# Altium PCB PiZero2W_Hat.PcbDoc
Units mil, origin at the board's own origin, x right, y up, seen from the top; angles counter-clockwise.
Board outline 2559.06 x 1181.1 mil, 4 copper layers (Top Layer, Layer 2, Layer 3, Bottom Layer), stack 23.756 mil thick; 31 components, 22 nets, 146 pads, 28 vias.
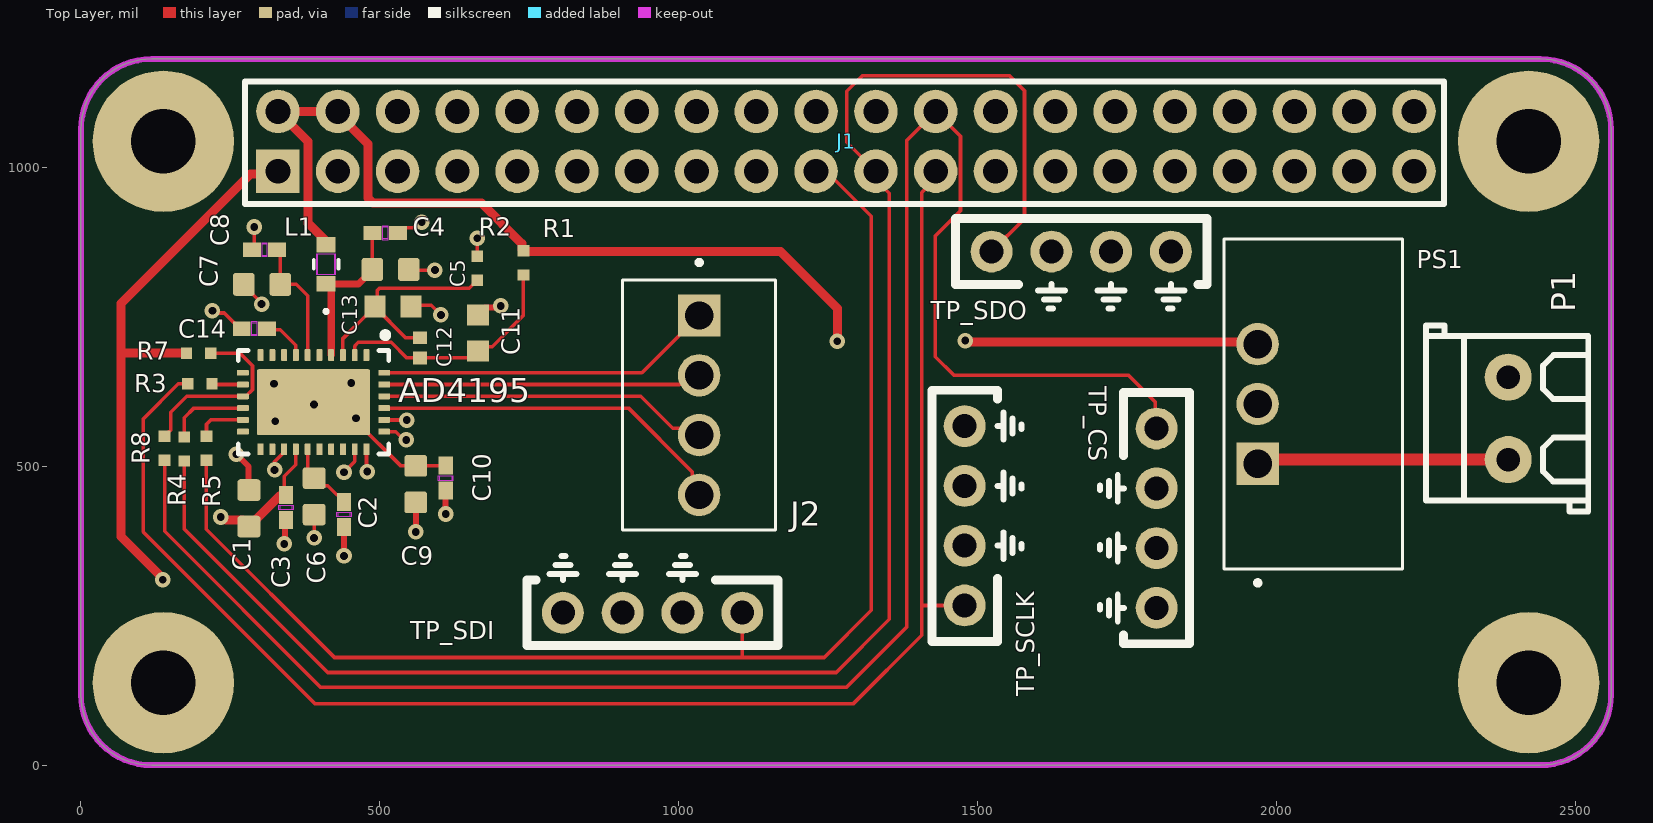
[diagram p0: Top Layer view]
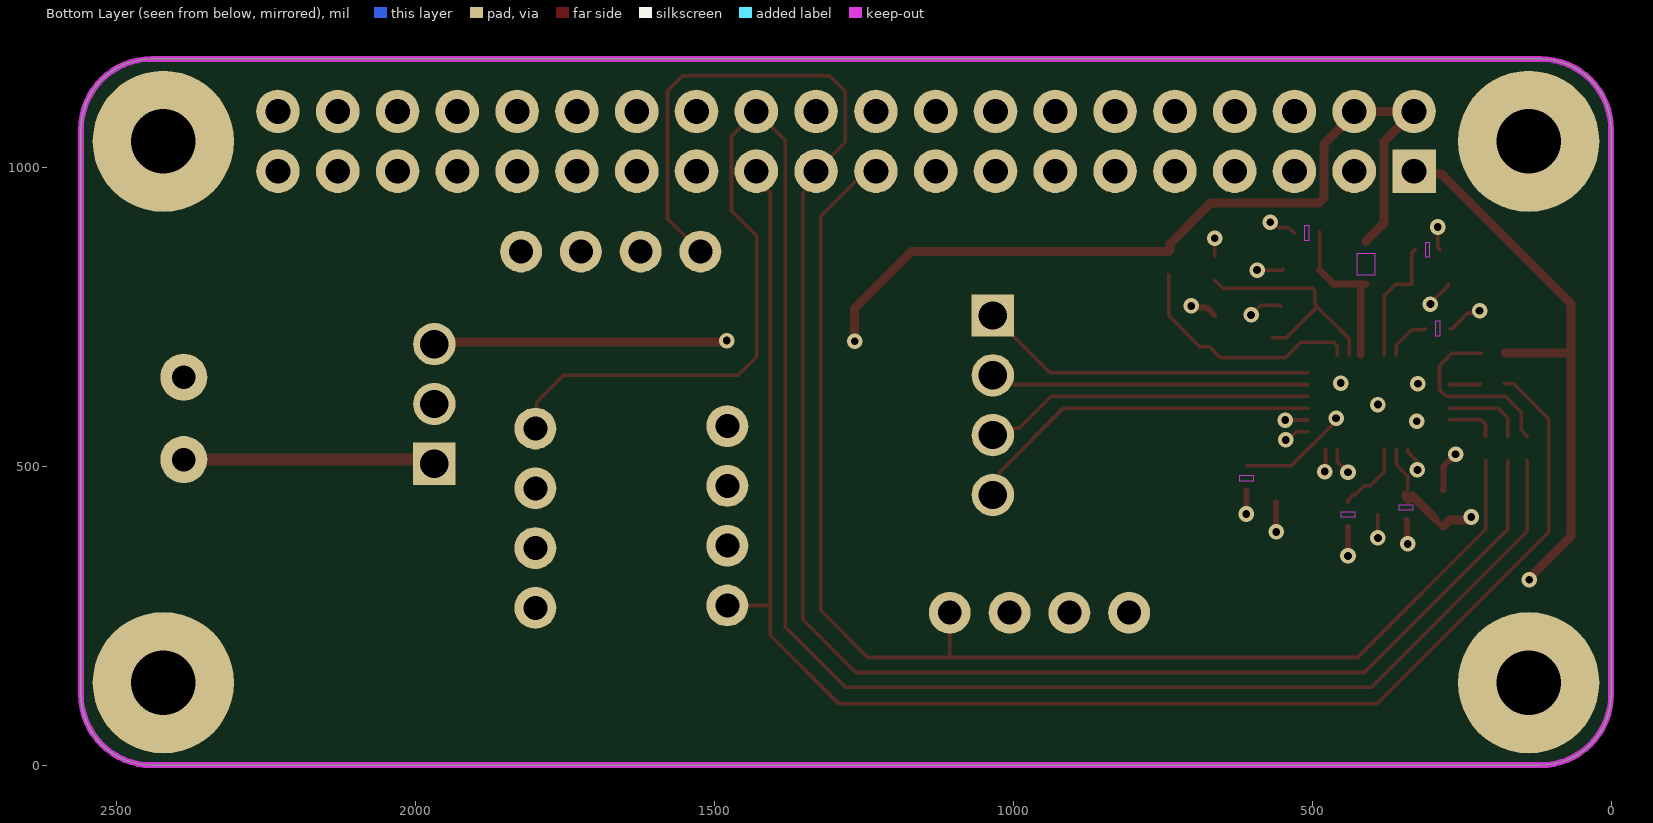
[diagram p1: Bottom Layer view, seen from below]
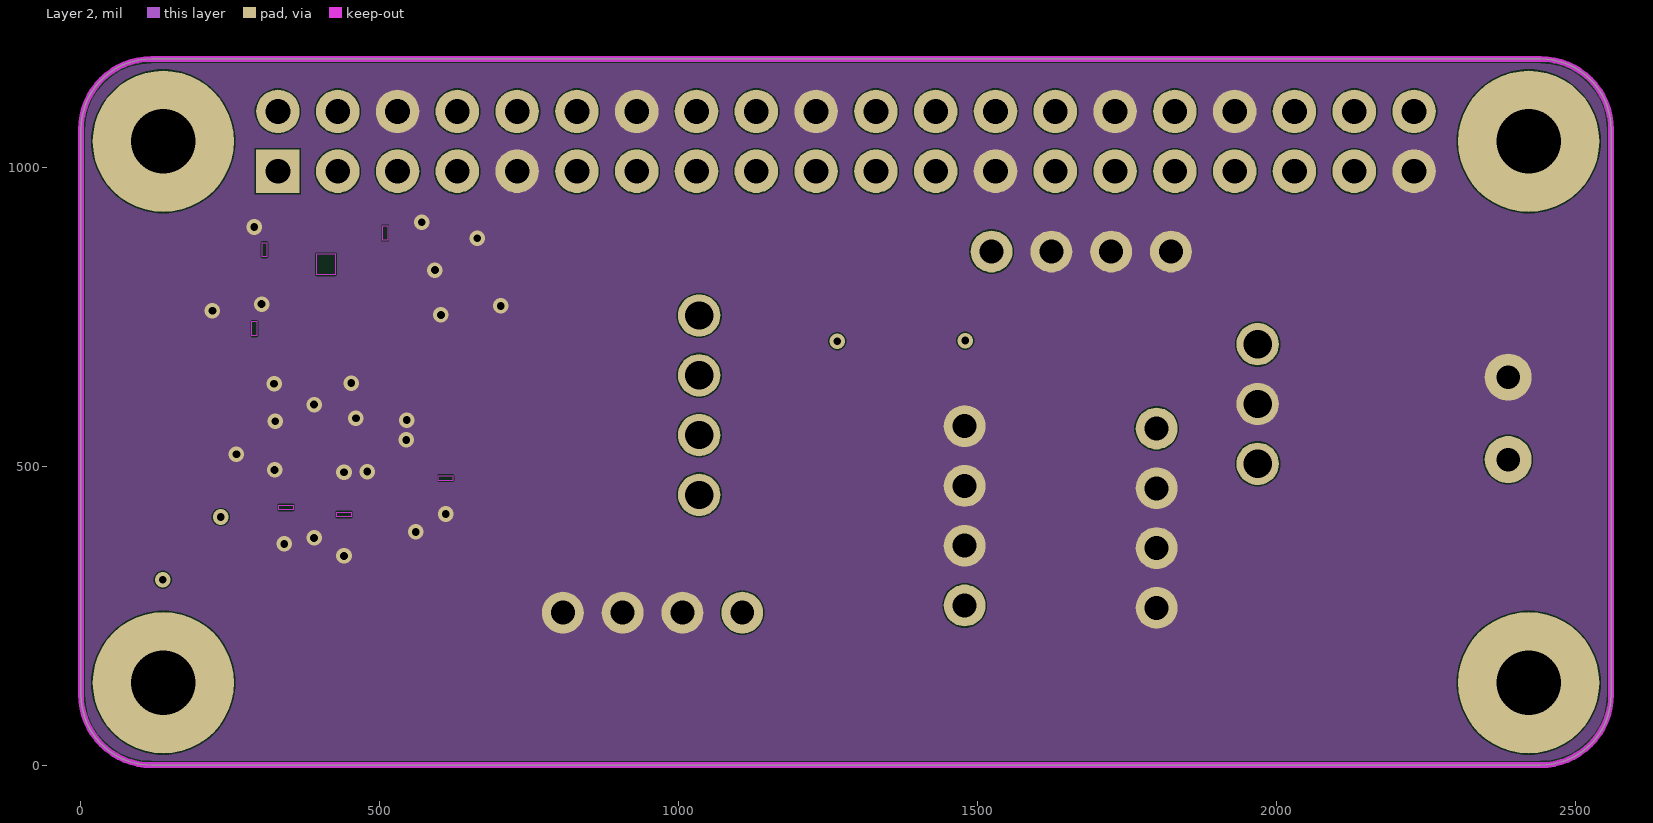
[diagram p2: Layer 2]
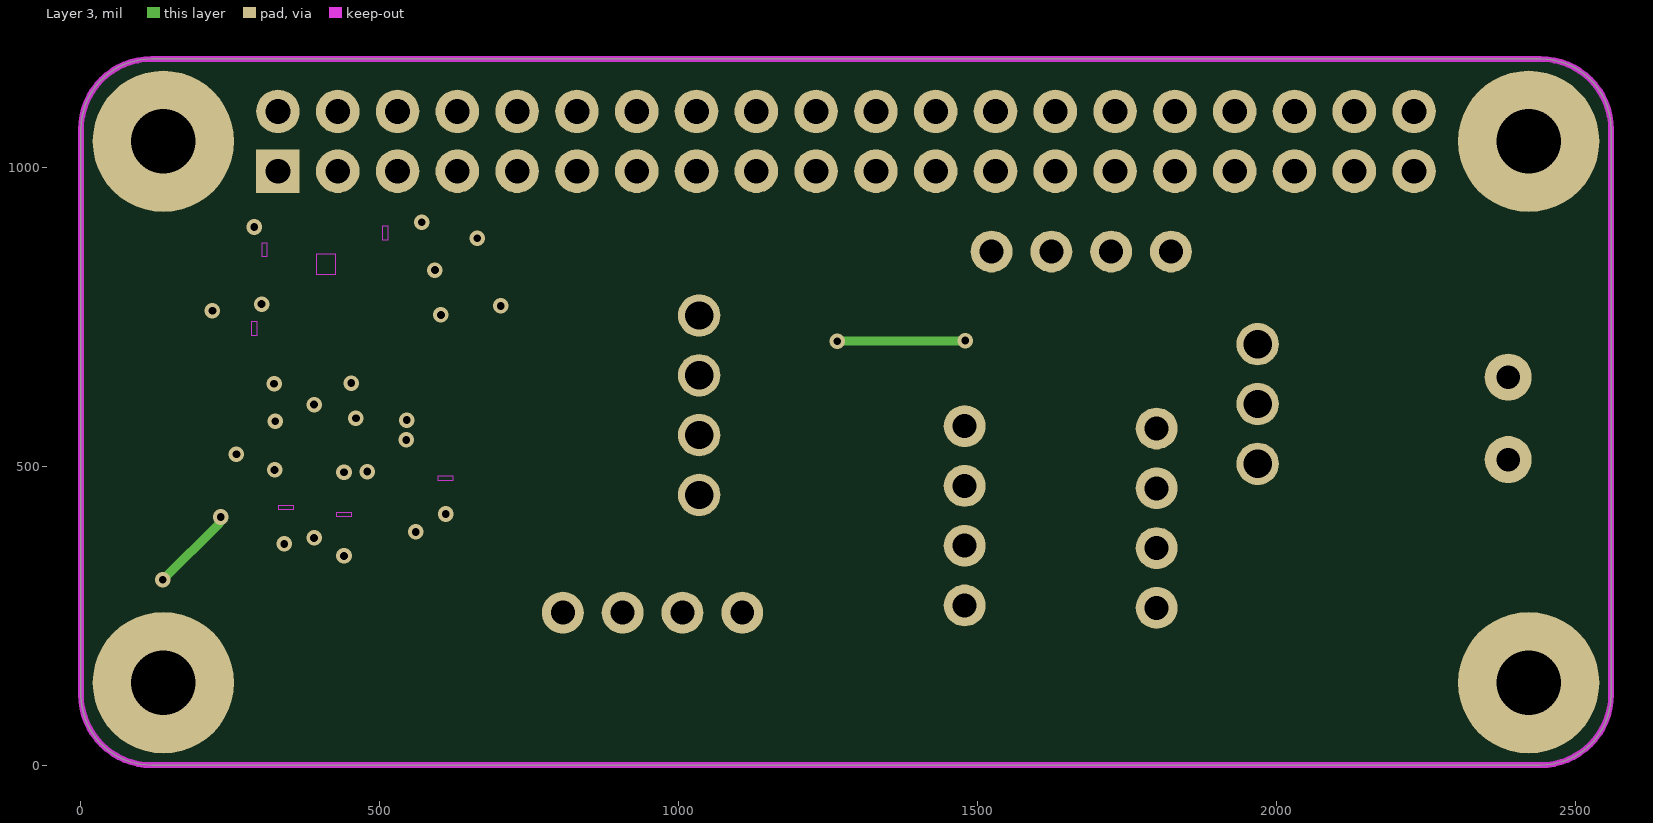
[diagram p3: Layer 3]
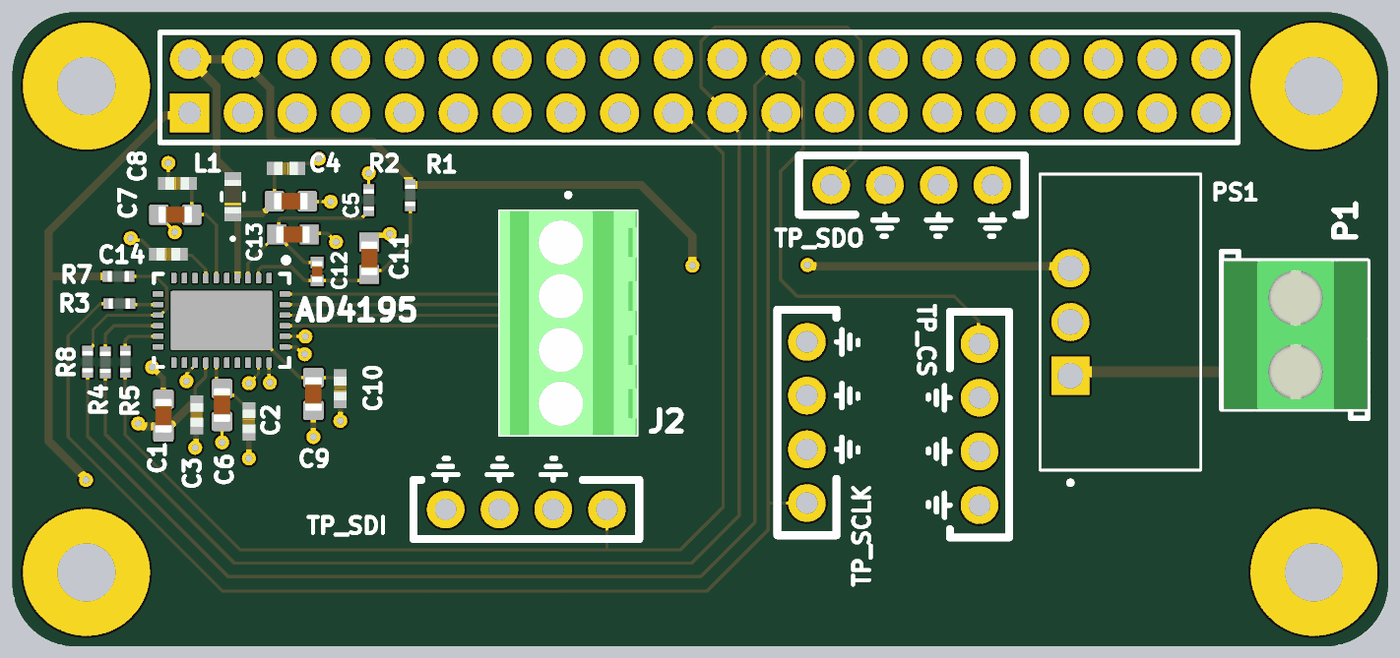
[diagram p4: 3D render of the assembled board from above, using the file's embedded part models]

## Layer stack, top to bottom
Top Solder: solder mask 0.4, Solder Resist, Dk 3.5
Top Layer: signal copper 1.4
Dielectric 2: prepreg 2.8, PP-006, Dk 4.1
Layer 2: signal copper 1.378
Dielectric 1: dielectric 12.6, FR-4, Dk 4.8
Layer 3: signal copper 1.378
Dielectric 3: prepreg 2.8, PP-006, Dk 4.1
Bottom Layer: signal copper 1.4
Bottom Solder: solder mask 0.4, Solder Resist, Dk 3.5

## Board outline
0,118.11 0,1062.99 cw(c118.11,1062.99) 118.11,1181.1 2440.94,1181.1 cw(c2440.94,1062.99) 2559.06,1062.99 2559.06,118.11 cw(c2440.94,118.11) 2440.94,0 118.11,0 cw(c118.11,118.11)

## Design rules (kind name [scope] priority, off if disabled: settings)
Clearance [All] p1: gap=2 ignorepadtopadclearanceinfootprint=FALSE
MinimumSolderMaskSliver [All] p1: minsoldermaskwidth=4
PlaneConnect [All] p1: planeconnectstyle=Direct reliefexpansion=20 reliefentries=4 reliefconductorwidth=10 reliefairgap=10
PolygonConnect [All] p1: connectstyle=Direct reliefconductorwidth=10 reliefentries=4 polygonreliefangle="90 Angle" airgapwidth=10
RoutingVias [All] p1: holewidth=28 width=50 viastyle="Through Hole" minholewidth=28 minwidth=50 maxholewidth=28 maxwidth=50
SilkToSilkClearance [All] p1: silktosilkclearance=3
SilkToSolderMaskClearance [IsPad] p1: minsilkscreentomaskgap=5 clearancetoexposedcopper=TRUE
SolderMaskExpansion [All] p1: expansion=4 istentingtop=FALSE
SupplyNets "Schematic Supply Nets_7" [InNet('+24')] p1: voltage=0.000
SupplyNets "Schematic Supply Nets_3" [InNet('GND')] p2: voltage=0.000
SupplyNets "Schematic Supply Nets_2" [InNet('+3.3')] p3: voltage=0.000
SupplyNets "Schematic Supply Nets" [InNet('+5')] p4: voltage=0.000
Width [All] p1: maxlimit=100 minlimit=6 preferedwidth=10
26 further rules are at their usual default settings.

## Components (designator, comment, footprint, x,y, rotation, side; value= is the part's Value field where it differs from the comment)
AD4195 "omponent_1" QFN50P400X600X80_HS-33N 389,607 r270 top
C1 "1uF" CAPC1608X90N#1 390,449.49 r270 top
C2 "0.1uF" 0402_AVX 440,419 r270 top
C3 "1uF" CAPC1608X90N#1 281,429.51 r270 top
C4 "0.1uF" 0402_AVX 509,890 r180 top
C5 "1uF" CAPC1608X90N#1 518,829 r180 top
C6 "0.1uF" 0402_AVX 343,431 r90 top
C7 "1uF" CAPC1608X90N#1 303,804 r0 top
C8 "0.1uF" 0402_AVX 307,862 r0 top
C9 "1uF" CAPC1608X90N#1 560,470 r90 top
C10 "0.1uF" 0402_AVX 610,480 r90 top
C11 "4.7 nF" CAPC1608X90N#2 664,722.68 r270 top
C12 "47 nF" CAPC1005X55N 567,697.99 r270 top
C13 "4.7 nF" CAPC1608X90N#2 522,767 r180 top
C14 "0.1uF" 0402_AVX 290,730 r0 top
J1 "Header_RaspberryPi_0_2W" "Edge Connector" 329.53,993.31 r0 top
J2 "4P Screw Terminal Block" TE_282834-4 1034,602 r270 top
L1 "1kΩ at 100MHz" IND_1608_TDK 410,837.41 r90 top
P1 "2P Screw Terminal Block" "P_Terminal block 3.5mm-pitch" 2387,580 r90 top
PS1 "Buck Converter" CONV_TSR_2-2450N 2061,604 r90 top
R1 "0 Ω" RES_ERJ-2GE0R00X 740,840 r90 top
R2 "0 Ω" RES_ERJ-2GE0R00X 663,831 r90 top
R3 "0 Ω" RES_ERJ-2GE0R00X 198.84,638 r0 top
R4 "0 Ω" RES_ERJ-2GE0R00X 173,528.84 r90 top
R5 "0 Ω" RES_ERJ-2GE0R00X 210,530 r90 top
R7 "1MΩ" RES_ERJ2RKF1004X 197,689 r180 top
R8 "0 Ω" RES_ERJ-2GE0R00X 140,530 r90 top
TP_CS "10x Probe TP" TP10x_Probe 1799,413 r270 top (schematic designator TP4)
TP_SCLK "10x Probe TP" TP10x_Probe 1478,417 r90 top (schematic designator TP3)
TP_SDI "10x Probe TP" TP10x_Probe 956,255 r180 top (schematic designator TP1)
TP_SDO "10x Probe TP" TP10x_Probe 1673,859 r0 top (schematic designator TP2)

## Footprints (in the part's own frame and the unit in brackets; to place one, negate y for a bottom-side part, rotate by r counter-clockwise, add the part's x,y. Pads: shape width x height; smd on the part's side, far side on the other; paste and mask are expansions set on the pad)
0402_AVX [mil]
  rect 30x24 smd paste+0 mask+0: 1(-21,0) 2(21,0)
  Top Layer keep-out region: -4,-10 -4,10 4,10 4,-10
  Keep-Out Layer region: -4,-12 -4,12 4,12 4,-12
  body extent -22,-12 22,12, height 22
CAPC1005X55N [mm]
  rect 0.54x0.6 smd: 1(-0.432,0) 2(0.432,0)
  body extent -0.5,-0.25 0.5,0.25, height 0.55
CAPC1608X90N#1 [mm]
  rrect25% 0.92x0.97 smd: 1(-0.775,0) 2(0.775,0)
  body extent -0.8,-0.4 0.8,0.4, height 0.9
CAPC1608X90N#2 [mm]
  rect 0.89x0.93 smd: 1(-0.77,0) 2(0.77,0)
  body extent -0.8,-0.4 0.8,0.4, height 0.9
CONV_TSR_2-2450N [mm]
  rect 1.8x1.8 / inner round 1.8 / far side rect 1.8x1.8 hole 1.2: 1(-2.54,2.36)
  round 1.8 hole 1.2: 2(0,2.36) 3(2.54,2.36)
  silkscreen extent -7.7,-3.8 7,3.8
"Edge Connector" [mm]
  rect 1.85x1.85 hole 1.05: 1(0,0)
  round 1.85 hole 1.05: 2(0,2.54) 3(2.54,0) 4(2.54,2.54) 5(5.08,0) 6(5.08,2.54) 7(7.62,0) 8(7.62,2.54) 9(10.16,0) 10(10.16,2.54) 11(12.7,0) 12(12.7,2.54) 13(15.24,0) 14(15.24,2.54) 15(17.78,0) 16(17.78,2.54) 17(20.32,0) 18(20.32,2.54) 19(22.86,0) 20(22.86,2.54) 21(25.4,0) 22(25.4,2.54) 23(27.94,0) 24(27.94,2.54) 25(30.48,0) 26(30.48,2.54) 27(33.02,0) 28(33.02,2.54) 29(35.56,0) 30(35.56,2.54) 31(38.1,0) 32(38.1,2.54) 33(40.64,0) 34(40.64,2.54) 35(43.18,0) 36(43.18,2.54) 37(45.72,0) 38(45.72,2.54) 39(48.26,0) 40(48.26,2.54)
  silkscreen extent -1.4,-1.4 49.53,3.81
IND_1608_TDK [mm]
  rect 0.656x0.8 smd paste+0 mask+0: 1(-0.828,0) 2(0.828,0)
  Top Layer keep-out region: -0.449,-0.349 -0.449,0.349 0.449,0.349 0.449,-0.349
  Keep-Out Layer region: -0.449,-0.4 -0.449,0.4 0.449,0.4 0.449,-0.4
  silkscreen extent -2.07,-0.53 0.19,0.53, body extent -0.8,-0.4 0.8,0.4, height 0.8
"P_Terminal block 3.5mm-pitch" [mm]
  round 2 hole 1: 1(-1.75,0) 2(1.75,0)
  silkscreen extent -3.95,-3.4 3.95,3.5, body extent -3.5,-3.4 3.5,3.4, height 8.4
QFN50P400X600X80_HS-33N [mm] "QFN, 32-Leads, Body 4.00x6.00mm, Pitch 0.50mm, Thermal Pad 2.60x4.60mm, IPC Medium Density"
  rrect25% 0.5x0.25 smd mask+0.07: 1(-2,2.25) 2(-2,1.75) 3(-2,1.25) 4(-2,0.75) 5(-2,0.25) 6(-2,-0.25) 7(-2,-0.75) 8(-2,-1.25) 9(-2,-1.75) 10(-2,-2.25) 17(2,-2.25) 18(2,-1.75) 19(2,-1.25) 20(2,-0.75) 21(2,-0.25) 22(2,0.25) 23(2,0.75) 24(2,1.25) 25(2,1.75) 26(2,2.25)
  rrect25% 0.25x0.5 smd mask+0.07: 11(-1.25,-3) 12(-0.75,-3) 13(-0.25,-3) 14(0.25,-3) 15(0.75,-3) 16(1.25,-3) 27(1.25,3) 28(0.75,3) 29(0.25,3) 30(-0.25,3) 31(-0.75,3) 32(-1.25,3)
  rrect5% 2.8x4.8 smd mask+0.07: 33(0,0)
  silkscreen extent -2.97,-3.2 2.2,3.2, body extent -2.05,-3.05 2.05,3.05, height 0.8
RES_ERJ2RKF1004X [mm]
  rect 0.475x0.5 smd: 1(-0.512,0) 2(0.512,0)
  body extent -0.5,-0.25 0.5,0.25, height 0.35
RES_ERJ-2GE0R00X [mm]
  rect 0.475x0.5 smd paste+0 mask+0.102: 1(-0.512,0) 2(0.512,0)
  body extent -0.5,-0.25 0.5,0.25, height 0.35
TE_282834-4 [mm]
  rect 1.8x1.8 / inner round 1.8 / far side rect 1.8x1.8 hole 1.2: 1(-3.81,0)
  round 1.8 hole 1.2: 2(-1.27,0) 3(1.27,0) 4(3.81,0)
  silkscreen extent -6.16,-3.25 5.31,3.25, body extent -5.31,-3.25 5.31,3.25, height 10
TP10x_Probe [mil] "Small Probs footprint"
  round 70 hole 40: 1(-150,0) 2(-50,0) 2(50,0) 2(150,0)
  silkscreen extent -210,-95 210,55

## Part data
AD4195: library part Component_1
C1 C3 C5 C7 C9: library part C0603C105K4RACTU, Package=None, Availability=Unavailable, MP=C0603C105K4RACTU, Price=None
C2 C4 C6 C8 C10 C14: library part 04023C104KAT2A, "Description", Manufacturer_Name="KYOCERA AVX", Copyright="Copyright (C) 2025 Ultra Librarian. All rights reserved.", Manufacturer_Part_Number=04023C104KAT2A
C11 C13: library part GRM1885C1H472JA01D, "0603 4.7 nF 50 V Â±5% Tolerance C0G SMT Multilayer Ceramic Capacitor", Package="1608 Murata", Check_prices=https://www.snapeda.com/parts/GRM1885C1H472JA01D/Murata/view-part/?ref=eda, MF=Murata, MP=GRM1885C1H472JA01D, SnapEDA_Link=https://www.snapeda.com/parts/GRM1885C1H472JA01D/Murata/view-part/?ref=snap
C12: library part GRM155R71E473KA88D, "SMD capacitor X7R(EIA) with capacitance 47000pF Tol.10%. Rated voltage 25Vdc 125C", Package="1005-2 Murata", Check_prices=https://www.snapeda.com/parts/GRM155R71E473KA88D/Murata/view-part/?ref=eda, MF=Murata, MP=GRM155R71E473KA88D, SnapEDA_Link=https://www.snapeda.com/parts/GRM155R71E473KA88D/Murata/view-part/?ref=snap
J2: library part 282834-4, "Conn; Term Blk; PCB; Wire Receptacle; 4; 2.54mm; 30-16AWG; Green; 10A;150V; M1.6", Package=None, Centerline_Pitch="2.54 mm[.1 in]", Check_prices=https://www.snapeda.com/parts/282834-4/TE+Connectivity+AMP+Connectors/view-part/?ref=eda, EU_RoHS_Compliance="Compliant with Exemptions", MF="TE Connectivity", MP=282834-4, Number_of_Positions=4, SnapEDA_Link=https://www.snapeda.com/parts/282834-4/TE+Connectivity+AMP+Connectors/view-part/?ref=snap
L1: library part MPZ1608S102ATA00, "Description", Manufacturer_Name=TDK, Copyright="Copyright (C) 2025 Ultra Librarian. All rights reserved.", Manufacturer_Part_Number=MPZ1608S102ATA00
P1: library part "P_Terminal block", "Green Straight pin 3.5mm  pitch; P=3.5mm  Screw terminal ROHS", LCSC Part#=C474892, Manufacturer="Cixi Kefa Elec", MFR Part #=KF350-3.5-2P, Datasheet=https://datasheet.lcsc.com/lcsc/2001160007_Cixi-Kefa-Elec-KF350-3-5-2P_C474892.pdf
PS1: library part TSR_2-2450N, Package=None, Availability=Unavailable, MF="{'manufacturer': u'Traco Power'}", MP=TSR_2-2450N, Price=None
R1 R2 R3 R4 R5 R8: library part ERJ-2GE0R00X, "Series/Type: Thick Film Chip Resistors, Power Rating (W): -, Chip Size (LxW(EIA)) (mm): 1.0 x 0.5 (EIA:0402), Resistance Values (â„", Package="1020-2 Panasonic", Check_prices=https://www.snapeda.com/parts/ERJ-2GE0R00X/Panasonic+Electronic+Components/view-part/?ref=eda, MF=Panasonic, MP=ERJ-2GE0R00X, SnapEDA_Link=https://www.snapeda.com/parts/ERJ-2GE0R00X/Panasonic+Electronic+Components/view-part/?ref=snap
R7: library part ERJ2RKF1004X, "1 MOhms 1% 0.1W, 1/10W Chip Resistor 0402 (1005 Metric) Automotive AEC-Q200 Thick Film", Package="1005-2 Panasonic", Check_prices=https://www.snapeda.com/parts/ERJ-2RKF1004X/Panasonic+Electronic+Components/view-part/?ref=eda, MF="Panasonic Electronic", MP=ERJ-2RKF1004X, SnapEDA_Link=https://www.snapeda.com/parts/ERJ-2RKF1004X/Panasonic+Electronic+Components/view-part/?ref=snap
TP_CS TP_SCLK TP_SDI TP_SDO: library part TP_10x_Probe, "Test Point 300 mil centers"

## Free pads (board coordinates)
  round 236.22 hole 108.27: 3(137.8,1043.31) 4(137.8,137.8) 5(2421.26,137.8) 6(2421.26,1043.31)

## Via types
v1: diameter 26, hole 13, Top Layer to Bottom Layer, 28 vias

## Nets (pads, with @x,y where several pads share a name; then routed paths per layer and width w, separated by ;. In a path a pad name is that pad's centre, name@x,y a point inside that pad or via, vN(x,y) a via of type N, cw(c..) or ccw(c..) an arc to the next point about the centre after c; other vN are vias at no path point)
+3.3: AD4195.20 C3.2 C6.2 J1.1 R7.2 | length 1320
  Top Layer w6: C6.2@340,462 340,483 359.47,502.47 AD4195.20
  Top Layer w10: C3.2 281.98,399 295.09,412.11 C3.2@295.09,413.09 ; J1.1@325.19,988.97 J1.1
  Top Layer w15: v1(137,310) 137,312.76 67,382.76 67,689 ; R7.2 67,689 ; v1(234,415) 236.98,415 242.37,409.61 270.39,409.61 C3.2@280,400 ; C3.2@295.09,413.09 332.5,450.5 C6.2@343,450.5 ; J1.1@325.19,988.97 283.97,988.97 67,772 67,689 ; C6.2@338.5,444.5 343,449 C6.2@343,450.5 ; C6.2 C6.2@343,450.5
  Layer 3 w15: v1(137,310) 231.9,404.9 231.9,412.9 v1(234,415)
+5: J1.2 J1.4 L1.2 PS1.3 R1.2 | length 2144.3
  Top Layer w15: L1.2@410,876 380,906 380,1042.83 J1.2 J1.4 429.53,1089.2 479.89,1038.83 479.89,948.79 488.68,940 670,940 737.66,872.34 737.66,862.01 739.51,860.16 R1.2 ; R1.2@740,859.16 1169.84,859.16 1265,764 v1(1265,709) ; v1(1479,710) 1481.1,707.9 1964.19,707.9 PS1.3
  Layer 3 w15: v1(1265,709) 1265.5,709.5 1478.5,709.5 v1(1479,710)
+24: P1.1 PS1.1 | length 421.9
  Top Layer w20: PS1.1 1975.19,511.1 P1.1
AIN1: AD4195.32 J2.1 | length 566.6
  Top Layer w6: AD4195.32 938.21,656.21 J2.1
AIN2: AD4195.31 J2.2 | length 533.3
  Top Layer w6: AD4195.31 1000.97,636.53 1016.45,652 J2.2
AIN3: AD4195.30 J2.3 | length 553.7
  Top Layer w6: AD4195.30 936.16,616.84 989.57,563.43 1022.57,563.43 J2.3
AIN4: AD4195.29 J2.4 | length 602.8
  Top Layer w6: AD4195.29 915.84,597.16 1022.08,490.92 1022.08,463.92 J2.4
CS: J1.24 R8.1 TP_CS.1 | length 3281.3
  Top Layer w6: R8.1 140,391 401,130 1280,130 1381,231 1381,1044.78 J1.24 1470.94,1051.89 1470.94,926.94 1429,885 1429,683 1460,652 1752,652 1797,607 1797,565 TP_CS.1
GND: AD4195.19 AD4195.25 AD4195.26 AD4195.27 AD4195.28 AD4195.33 C1.2 C2.2 C3.1 C4.1 C5.1 C6.1 C7.1 C8.1 C9.1 C9.2 C10.1 C10.2 C11.1 C13.1 C14.1 J1.6 J1.9 J1.14 J1.20 J1.25 J1.30 J1.34 J1.39 P1.2 PS1.2 R2.2 TP_CS.2 TP_SCLK.2 TP_SDI.2 TP_SDO.2 | length 1044.4
  Top Layer w6: v1(220,760) 223.83,756.17 239.83,756.17 266,730 C14.1 ; C7.1 272.49,802.19 302.22,772.46 v1(302.22,771.11) ; C8.1 290,866 v1(290,900) ; v1(323.83,493.83) 323.83,507.38 339.79,523.34 AD4195.19 ; v1(390,380) C1.2 ; v1(440,490) 457.9,507.9 AD4195.25 ; v1(460,580) 460,575.37 534.37,501 C9.2@560,501 ; AD4195.26 477.58,492.42 v1(479,491) ; AD4195.27 526.67,557.79 540.46,544 v1(544,544) ; AD4195.28 507.35,577.24 544.76,577.24 v1(545,577) ; C4.1 539,899 555.59,899 564.59,908 v1(570,908) ; C5.1 549.51,828 v1(592,828) ; C13.1 554.32,769 586,769 v1(602,753) ; C9.2 C10.2@609.51,500.51 ; R2.2 v1(663,881)
  Top Layer w10: v1(260,520) 280.5,499.5 280.5,460.52 C3.1 ; v1(340,370) 341.5,371.5 341.5,408.5 C6.1 ; v1(440,350) C2.2 ; v1(560,390) C9.1 ; v1(610,420) C10.1 ; C11.1 676.52,765.52 699.52,765.52 v1(702,768)
  other v1: 325,575 390,603 323,638 452,639
MISO_SDO: J1.21 R4.1 TP_SDO.1 | length 2951.3
  Top Layer w6: R4.1 173,395 413,155 1263,155 1352,244 1352,956.52 1329.53,978.99 J1.21 1281,1041.83 1281,1127 1307,1153 1553,1153 1578,1128 1578,914 TP_SDO.1
MOSI_SDI: J1.19 R5.1 TP_SDI.1 | length 2207.1
  Top Layer w6: R5.1@209.51,509.84 209.51,394.49 424,180 1106,180 ; TP_SDI.1 1106,180 ; J1.19 1246.69,993.31 1322,918 1322,259 1243,180 1106,180
NetAD4195_2: AD4195.2 C11.2 C12.2 R1.1 | length 407.8
  Top Layer w6: AD4195.2 457.9,700.9 464,707 519,707 545.02,680.98 C12.2 652.61,680.98 C11.2 671.42,699.79 687.79,699.79 740,752 R1.1
NetAD4195_3: AD4195.3 C12.1 C13.2 R2.1 | length 402.4
  Top Layer w6: AD4195.3 438.21,713.53 476.38,751.69 477.17,751.69 491.68,766.21 542.9,715 C12.1 ; C13.2 495.8,771.12 495.8,793.8 499.32,797.32 649.47,797.32 R2.1
NetAD4195_4: AD4195.4 C4.2 C5.2 L1.1 | length 273.2
  Top Layer w6: C5.2 487.49,891.49 C4.2@488,892
  Top Layer w12: L1.1 464.29,804.82 487.49,828.02 C5.2 ; L1.1@411.62,804.82 418.53,797.91 AD4195.4
NetAD4195_6: AD4195.6 C7.2 C8.2 | length 213
  Top Layer w6: C8.2 333.51,856.49 C7.2 360,804 379.16,784.84 AD4195.6
NetAD4195_12: AD4195.12 R3.2 | length 52.5
  Top Layer w6: R3.2 220.47,636.53 AD4195.12
NetAD4195_13: AD4195.13 R7.1 R8.2 | length 315.5
  Top Layer w6: R8.2 140.49,550.16 146.84,556.51 146.84,557 150,560.16 150,590 176.84,616.84 AD4195.13 275.81,616.84 287,628.03 287,668 266,689 R7.1
NetAD4195_14: AD4195.14 R4.2 | length 136.6
  Top Layer w6: R4.2 173,581 189.16,597.16 AD4195.14
NetAD4195_15: AD4195.15 R5.2 | length 83.8
  Top Layer w6: R5.2 210,570 217.47,577.47 AD4195.15
NetAD4195_21: AD4195.21 C1.1 C2.1 | length 121.1
  Top Layer w6: AD4195.21 379.16,490.84 402.64,467.36 412.64,467.36 428,452 431,452 440,443 C2.1
REFOUT: AD4195.7 C14.2 | length 76.4
  Top Layer w6: C14.2 312.83,728.17 333.41,728.17 359.47,702.1 AD4195.7
SCLK: J1.23 R3.1 TP_SCLK.1 | length 2614.3
  Top Layer w6: R3.1 163,638 104,579 104,390 391,103 1292,103 1406,217 1406,267 ; J1.23 1429.53,981.1 1406,957.58 1406,267 ; TP_SCLK.1 1406,267
pads on no net: AD4195.1 AD4195.5 AD4195.8 AD4195.9 AD4195.10 AD4195.11 AD4195.16 AD4195.17 AD4195.18 AD4195.22 AD4195.23 AD4195.24 J1.3 J1.5 J1.7 J1.8 J1.10 J1.11 J1.12 J1.13 J1.15 J1.16 J1.17 J1.18 J1.22 J1.26 J1.27 J1.28 J1.29 J1.31 J1.32 J1.33 J1.35 J1.36 J1.37 J1.38 J1.40

## Polygon pours and split planes (outlines as drawn)
GND on Layer 2 "GND_L02_P000" (solid, pour order 0): 0,0 2560,0 2560,1180 0,1180

## Keep-outs
Keep-Out Layer:
  the board outline again, w10